# Altium PCB NPS_pcb.PcbDoc
Units mm, origin at the board's own origin, x right, y up, seen from the top; angles counter-clockwise.
Board outline 50 x 50 mm, 2 copper layers (Top Layer, Bottom Layer); 6 components, 9 nets, 34 pads, 0 vias.
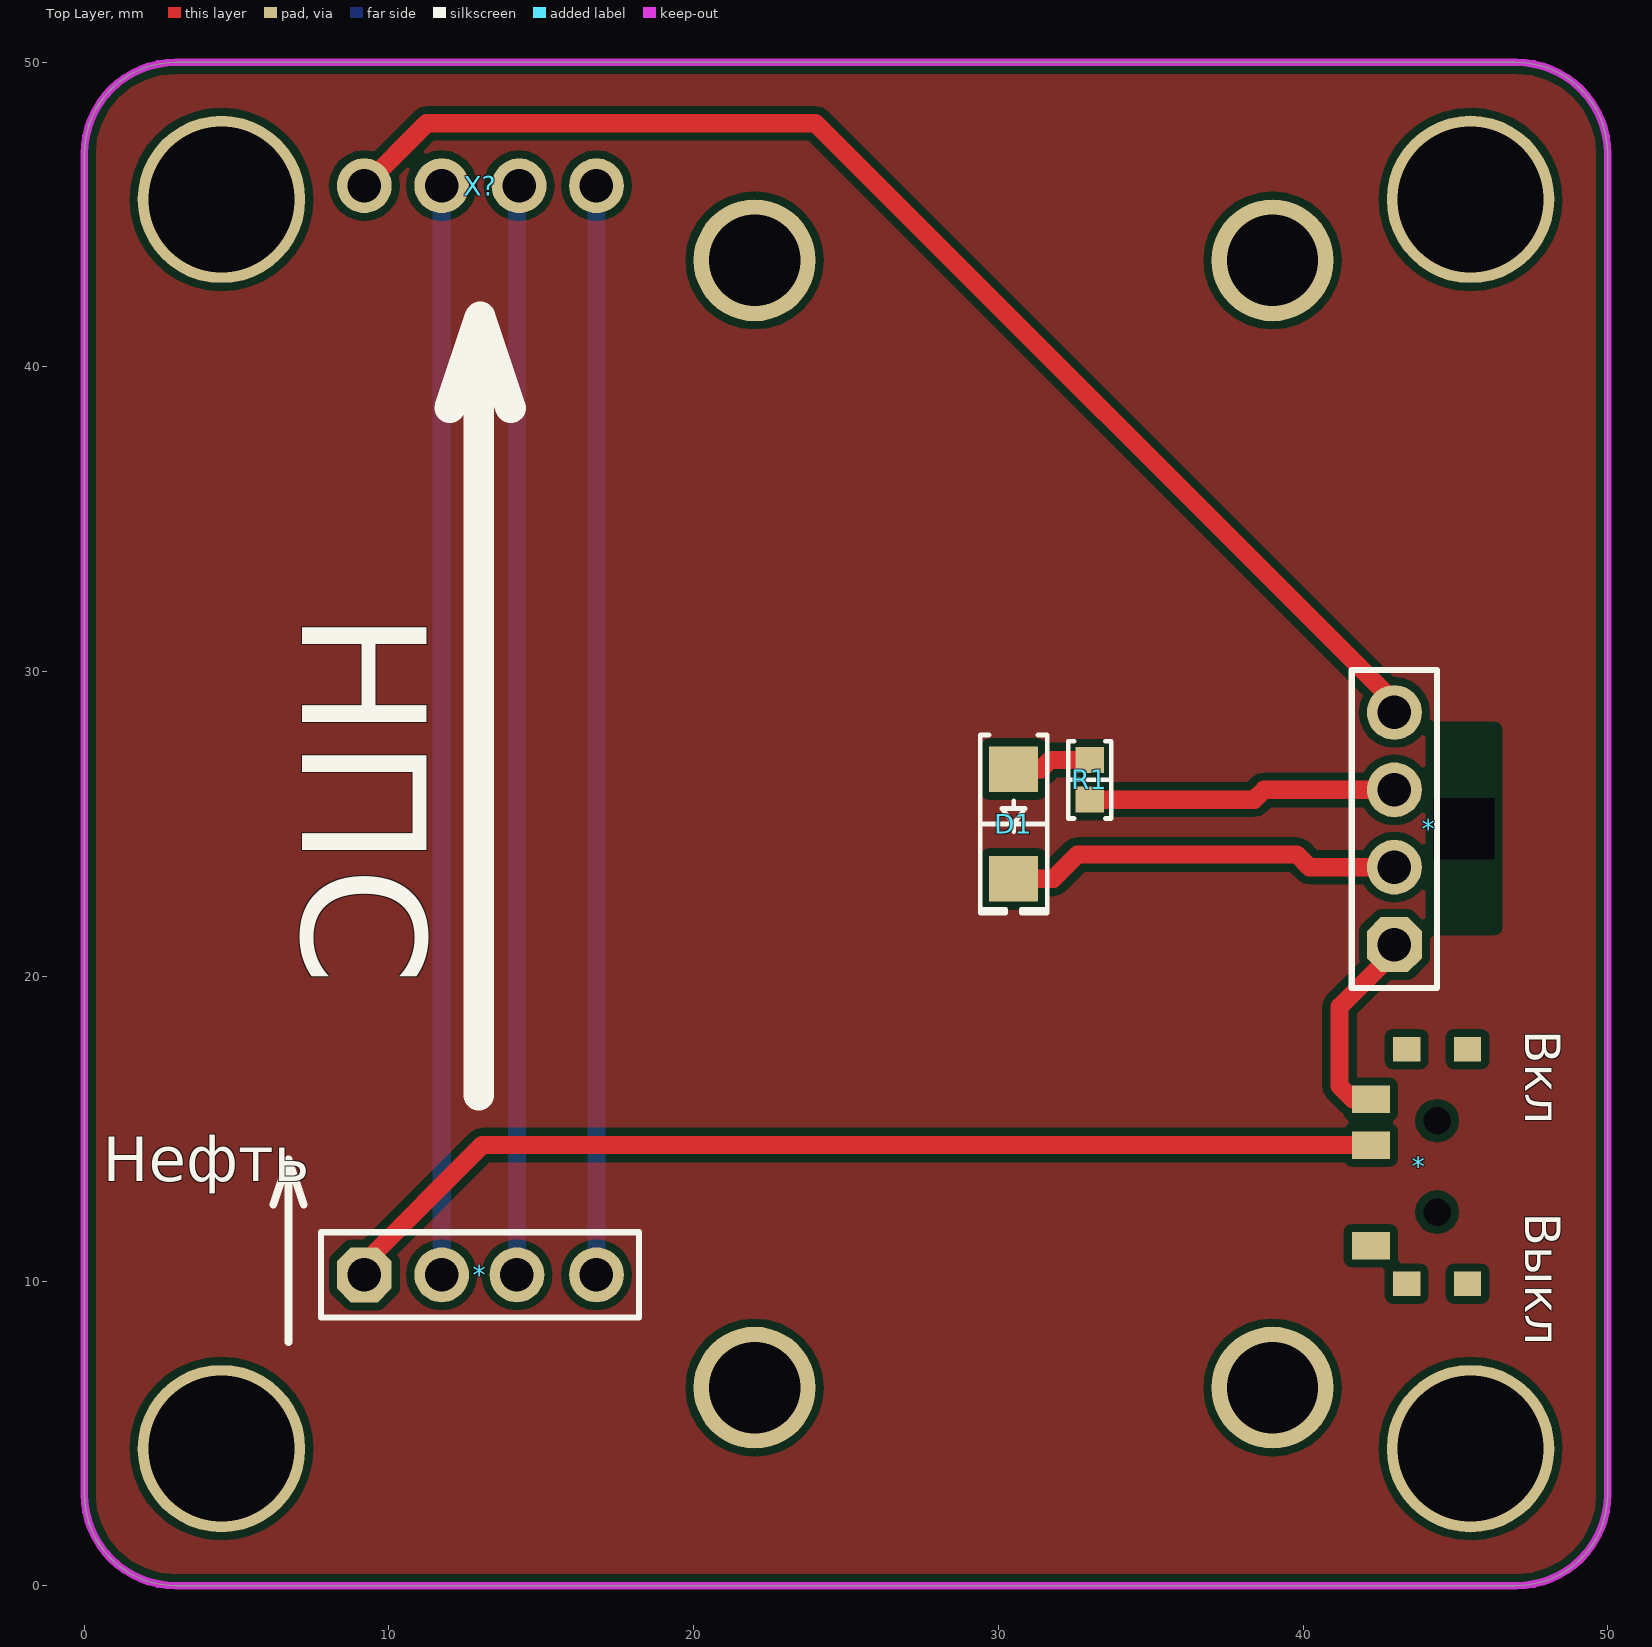
[diagram p0: Top Layer view]
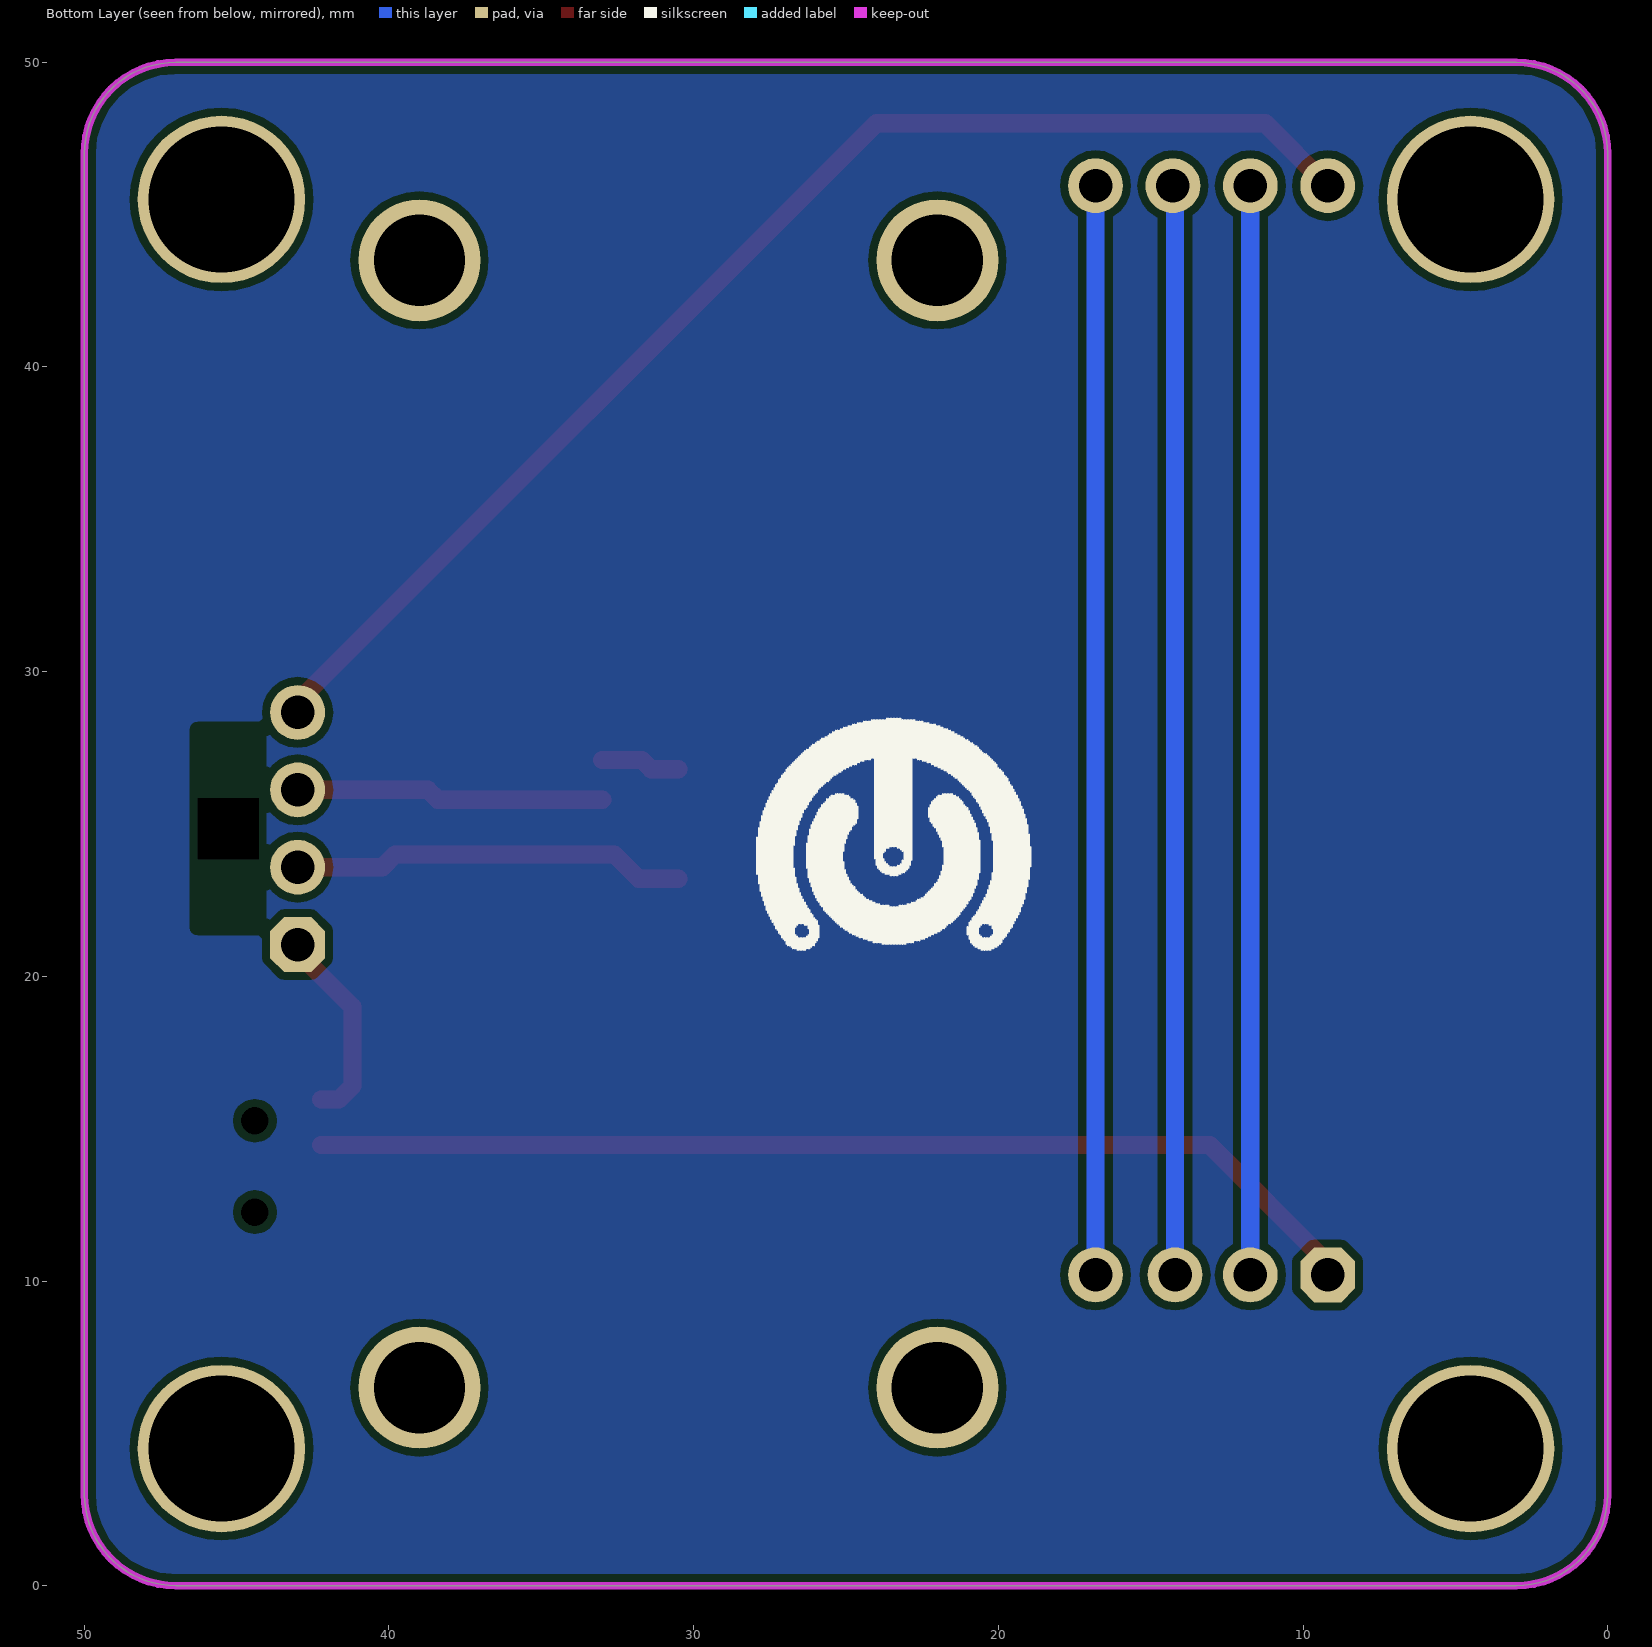
[diagram p1: Bottom Layer view, seen from below]

## Layer stack, top to bottom
Top Solder: solder mask 0.0102, Solder Resist, Dk 3.5
Top Layer: signal copper 0.0356
Dielectric 1: dielectric 0.32, FR-4, Dk 4.8
Bottom Layer: signal copper 0.0356
Bottom Solder: solder mask 0.0102, Solder Resist, Dk 3.5

## Board outline
0,3 0,47 cw(c3,47) 3,50 47,50 cw(c47,47) 50,47 50,3 cw(c47,3) 47,0 3,0 cw(c3,3)

## Design rules (kind name [scope] priority, off if disabled: settings)
Clearance [All] p1: gap=0.254 ignorepadtopadclearanceinfootprint=FALSE except(0: Arc-Hole Track-Hole SMDPad-Hole THPad-Hole Via-Hole Fill-Hole Poly-Hole Region-Hole Text-Hole)
PolygonConnect [All] p1: connectstyle=Relief reliefconductorwidth=0.254 reliefentries=4 polygonreliefangle="90 Angle" airgapwidth=0.254
RoutingVias [All] p1: holewidth=0.711 width=1.27 viastyle="Through Hole" minholewidth=0.711 minwidth=1.27 maxholewidth=0.711 maxwidth=1.27
SolderMaskExpansion [All] p1: expansion=0.102
Width [All] p1: maxlimit=2 minlimit=0.254 preferedwidth=0.6
30 further rules are at their usual default settings.

## Classes and differential pairs
component class NPS_sch: * D1 R1 X?

## Components (designator, comment, footprint, x,y, rotation, side; value= is the part's Value field where it differs from the comment)
* "PBS 4" "PBS-4 CUT" 43,24.851 r90 top
* "PBS 4" "PBS-4 RIGHT ANGLE" 13,10.2 r0 top
* "switcher" switcher 44.4,13.8 r0 top
D1 "White" "LED 1206_3216" 30.5,25 r270 top
R1 "10 kOhms" "RES 0603_1608" 33,26.45 r90 top
X? "PLS 4" "pls-4 right angle" 13,45.95 r0 top

## Footprints (in the part's own frame and the unit in brackets; to place one, negate y for a bottom-side part, rotate by r counter-clockwise, add the part's x,y. Pads: shape width x height; smd on the part's side, far side on the other; paste and mask are expansions set on the pad)
"LED 1206_3216" [mm] "Chip Diode, 2-Leads, Body 3.13x1.55mm, IPC Medium Density"
  rect 1.5x1.6 smd: 1(-1.8,0) 2(1.8,0)
  silkscreen extent -2.92,-1.1 2.92,1.1, body extent -1.6,-0.8 1.6,0.8, height 0.9
"PBS-4 CUT" [mm]
  oct 1.8x1.8 hole 1.1: 1(-3.81,0)
  round 1.8 hole 1.1: 2(-1.27,0) 3(1.27,0) 4(3.81,0)
  rrect50% 0x0 hole 2 square: ""(0,-2.28)
  silkscreen extent -5.23,-1.4 5.2,1.4, body extent -5.08,-1.27 5.08,1.27, height 8.4
"PBS-4 RIGHT ANGLE" [mm]
  oct 1.8x1.8 hole 1.1: 1(-3.81,0)
  round 1.8 hole 1.1: 2(-1.27,0) 3(1.2,0) 4(3.81,0)
  silkscreen extent -5.23,-1.4 5.2,1.4, body extent -5.08,-10.2 5.08,0, height 2.54
"pls-4 right angle" [mm]
  round 1.8 hole 1.1: 1(-3.81,0) 2(-1.27,0) 3(1.27,0) 4(3.81,0)
  body extent -5.04,-0.32 5.14,10.04, height 2.57
"RES 0603_1608" [mm] "Chip Resistor, 2-Leads, Body 1.60x0.80mm, IPC Medium Density"
  rect 0.85x0.95 smd: 1(-0.65,0) 2(0.65,0)
  silkscreen extent -1.27,-0.7 1.27,0.7, body extent -0.8,-0.4 0.8,0.4, height 0.45
switcher [mm] "SS-3292S-L1"
  rect 1.25x0.9 smd: 1(-2.175,-2.639) 2(-2.175,0.661) 3(-2.175,2.161)
  rect 0.9x0.8 smd: ""(-1,-3.889) ""(-1,3.811) ""(1,-3.889) ""(1,3.811)
  round 0 hole 0.9 unplated: ""(0,-1.539) ""(0,1.461)
  body extent -1.52,-4.38 1.52,4.38, height 6

## Part data
D1: library part SM1206NUWC-IL, "LED WHITE DIFFUSED 1206 SMD", Current - Test=20mA, Device Package="1206 (3216 Metric)", Lens Color=1.40mm, Manufacturer="Bivar Inc.", Millicandela Rating=750mcd, Supplier Device Package=1206, Supplier Part Number 1=492-1946-1-ND, Voltage - Forward (Vf) (Typ)=3.1V, Color=White, ComponentLink1Description=Datasheet, ComponentLink1URL=https://www.bivar.com/Files/Datasheets/SM1206NUWC-IL.pdf, ComponentLink2Description="DigiKey Link", ComponentLink2URL=http://digikey.com/product-detail/en/bivar-inc/SM1206NUWC-IL/492-1946-1-ND/5030122, Configuration=Standard, Height (Max)=1.40mm, LastUpdated="21.01.2020 3:32:32", Lens Size="1.10mm Dia", Lens Style="Round with Flat Top", Lens Transparency=Diffused, Lifecycle Status=Active, Minimum Order=1, Mounting Type="Surface Mount", Package / Case="1206 (3216 Metric)", Packaging=TapeAndReel, PartId=931, Part Number=SM1206NUWC-IL, Part Status=Active, Price=0.33, Series=-, Size / Dimension="3.20mm L x 1.60mm W", Supplier 1=DigiKey, Viewing Angle=30°
R1: library part RNCS0603BKE10K0, "RES 10K OHM 0.1% 1/16W 0603", Device Package="0603 (1608 Metric)", Manufacturer="Stackpole Electronics Inc", Operating Temperature="-55°C ~ 155°C", Power (Watts)="0.063W, 1/16W", Ratings=AEC-Q200, Supplier Device Package=0603, Supplier Part Number 1=RNCS0603BKE10K0CT-ND, Temperature Coefficient=±25ppm/°C, Tolerance=±0.1%, ComponentLink1Description=Datasheet, ComponentLink1URL=https://www.seielect.com/catalog/sei-rncs_rnch.pdf, ComponentLink2Description="DigiKey Link", ComponentLink2URL=http://digikey.com/product-detail/en/stackpole-electronics-inc/RNCS0603BKE10K0/RNCS0603BKE10K0CT-ND/1800113, Composition="Thin Film", Features="Anti-Corrosive, Automotive AEC-Q200, Moisture Resistant", Height - Seated (Max)="0.022\" (0.55mm)", LastUpdated="21.01.2020 0:25:01", Lifecycle Status=Active, Minimum Order=1, Number of Terminations=2, Package / Case="0603 (1608 Metric)", Packaging=TapeAndReel, PartId=4838, Part Number=RNCS0603BKE10K0, Part Status=Active, Price=0.08, Resistance="10 kOhms", Series=RNCS, Size / Dimension="0.061\" L x 0.031\" W (1.55mm x 0.80mm)", Supplier 1=DigiKey

## Free pads (board coordinates)
  round 5.5 hole 4.8: 7(4.5,4.5) 7(4.5,45.5) 7(45.5,4.5) 7(45.5,45.5)
  round 4 hole 3: 8(22,6.5) 8(22,43.5) 8(39,6.5) 8(39,43.5)

## Nets (pads, with @x,y where several pads share a name; then routed paths per layer and width w, separated by ;. In a path a pad name is that pad's centre, name@x,y a point inside that pad or via, vN(x,y) a via of type N, cw(c..) or ccw(c..) an arc to the next point about the centre after c; other vN are vias at no path point)
blue: *.2@11.73,10.2 X?.2 | length 35.7
  Bottom Layer w0.6: *.2@11.73,10.2 X?.2
gnd: *.2@43,23.581 D1.2 | length 13
  Top Layer w0.6: D1.2 31.8,23.2 32.6,24 39.8,24 40.219,23.581 *.2@43,23.581
gnd1: *.1@43,21.041 *.3@42.225,15.961 | length 6.6
  Top Layer w0.6: *.3@42.225,15.961 41.639,15.961 41.2,16.4 41.2,19 43,20.8 *.1@43,21.041
gnd4: *.4@43,28.661 X?.1 | length 42.9
  Top Layer w0.6: X?.1 11.24,48 24,48 43,29 *.4@43,28.661
gndf: *.1@9.19,10.2 *.2@42.225,14.461 | length 35
  Top Layer w0.6: *.1@9.19,10.2 9.19,10.59 13.061,14.461 *.2@42.225,14.461
green: *.4@16.81,10.2 X?.4 | length 35.7
  Bottom Layer w0.6: *.4@16.81,10.2 X?.4
NetD1_1: D1.1 R1.2 | length 2.6
  Top Layer w0.6: D1.1 31.4,26.8 31.7,27.1 R1.2
red: *.3@14.2,10.2 X?.3 | length 35.8
  Bottom Layer w0.6: *.3@14.2,10.2 14.2,45.88 X?.3
VCC: *.3@43,26.121 R1.1 | length 10.1
  Top Layer w0.6: R1.1 38.4,25.8 38.721,26.121 *.3@43,26.121
pads on no net: *. *.1@42.225,11.161

## Polygon pours and split planes (outlines as drawn)
no net on Top Layer "Top Layer-No Net" (solid, pour order 0): 0,3 0,47 cw(c3,47) 3,50 47,50 cw(c47,47) 50,47 50,3 cw(c47,3) 47,0 3,0 cw(c3,3)
no net on Bottom Layer "Top Layer-No Net1" (solid, pour order 1): 0,3 0,47 cw(c3,47) 3,50 47,50 cw(c47,47) 50,47 50,3 cw(c47,3) 47,0 3,0 cw(c3,3)

## Keep-outs
Keep-Out Layer:
  the board outline again, w0.254

## Silkscreen, mask and mechanical layers (free items; w line width, h text height)
Top Overlay:
  lines w0.254: 6.2,12.5 6.7,14 ; 6.7,8 6.7,14 ; 7.2,12.5 6.7,14
  lines w1: 11.993,38.654 12.992,41.65 13.99,38.654 ; 12.942,16.1 12.942,41.1
  text "НПС" at 5.8,32 h7 r270
  text "Вкл" at 46.9,18.235 h2 r270
  text "Нефть" at 0.6,12.8 h2.5
  text "Выкл" at 46.9,12.235 h2 r270
Bottom Overlay:
  drawing of 376 lines, arcs and shapes, not listed